# EAGLE board sonar_amplifierstage (EAGLE 7.6.0)
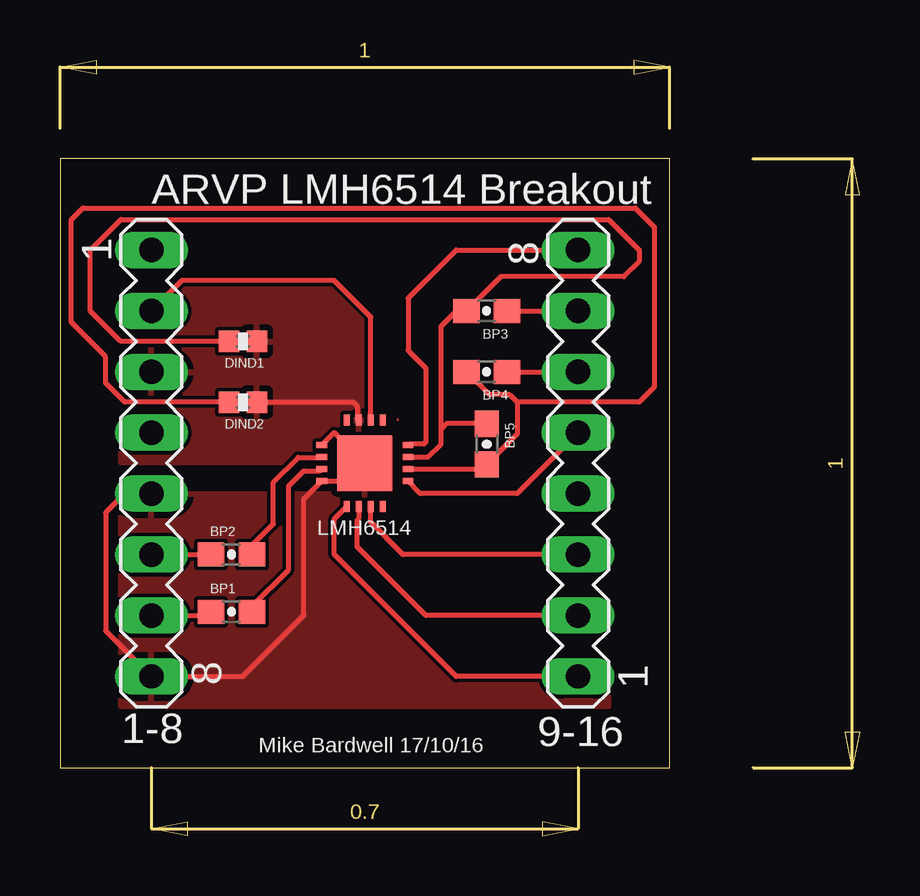
[diagram p0: board, top side]

Size 25.4 x 25.4 mm. Coordinates in mm from the lower left corner, seen from the top.
Outline: 0,0 25.4,0 25.4,25.4 0,25.4 0,0
Copper layers (1*16): Top 0.035mm / dielectric 1.5mm / Bottom 0.035mm
Design rules "ITead_rule": minimum track width 6mil, minimum drill 12mil, track to track 6mil, track to pad 6mil, pad to pad 6mil, via to via 6mil, smd to smd 0mil, copper to edge 10mil, drill to drill 10mil, minimum pad ring 10mil, minimum via ring 6mil, stop-mask expansion 2mil, vias tented up to drill 100mil, thermal gap 10mil

## Footprints (pad centres in the part's own frame; a part is rotated, then mirrored left to right if it is on the bottom)
MA08-1 = drill 1.016 long: 1 -8.89,0; 2 -6.35,0; 3 -3.81,0; 4 -1.27,0; 5 1.27,0; 6 3.81,0; 7 6.35,0; 8 8.89,0
0603-CAP = smd 1.1 x 1: 1 -0.85,0; 2 0.85,0
0402-RES = smd 0.85 x 0.9: 1 -0.58,0; 2 0.58,0
WQFN4X4 = smd 2.3 x 2.3: GND 0,0 | smd 0.25 x 0.45: P$1 0.75,1.8; P$2 0.25,1.8; P$3 -0.25,1.8; P$4 -0.75,1.8; P$9 -0.75,-1.8; P$10 -0.25,-1.8; P$11 0.25,-1.8; P$12 0.75,-1.8 | smd 0.45 x 0.25: P$5 -1.8,0.75; P$6 -1.8,0.25; P$7 -1.8,-0.25; P$8 -1.8,-0.75; P$13 1.8,-0.75; P$14 1.8,-0.25; P$15 1.8,0.25; P$16 1.8,0.75

## Placement (x,y rotation side)
1-8  [MA08-1]  3.81,12.7 270 top
9-16  [MA08-1]  21.59,12.7 90 top
BP1  160p  [0603-CAP]  7.14,6.51 0 top
BP2  160p  [0603-CAP]  7.14,8.89 0 top
BP3  160p  [0603-CAP]  17.78,19.05 180 top
BP4  160p  [0603-CAP]  17.78,16.51 180 top
BP5  1u  [0603-CAP]  17.78,13.49 270 top
DIND1  43n  [0402-RES]  7.62,17.78 180 top
DIND2  43n  [0402-RES]  7.62,15.24 180 top
U$1  LMH6514  [WQFN4X4]  12.7,12.7 0 top

## Library data of the parts
1-8 9-16 = con-lstb; OC_FARNELL: unknown; OC_NEWARK: unknown
BP1-BP5 = SparkFun-Capacitors
DIND1 DIND2 U$1 = SONAR

## Nets
GAIN0: 9-16.3 U$1.P$11
GAIN1: 9-16.2 U$1.P$10
GAIN2: 9-16.1 U$1.P$9
GND: 1-8.5 1-8.8 U$1.GND U$1.P$5 U$1.P$8
IN+: BP2.2 U$1.P$6
IN++: 1-8.6 BP2.1
IN-: BP1.2 U$1.P$7
IN--: 1-8.7 BP1.1
LATCH: 1-8.2 U$1.P$2
LOAD+: 9-16.5 U$1.P$13
LOAD-: 9-16.8 U$1.P$16
OUT+: BP4.2 BP5.2 DIND2.2 U$1.P$14
OUT++: 9-16.6 BP4.1
OUT-: BP3.2 BP5.1 DIND1.2 U$1.P$15
OUT--: 9-16.7 BP3.1
V+: 1-8.3 DIND1.1 DIND2.1 U$1.P$3

## Tracks (layer width: path | path; a pad name or v marks a point on that pad's centre or on a via)
GAIN0
  Top 0.203: 9-16.3 14.29,8.89 12.94,10.24 12.94,10.89 U$1.P$11
GAIN1
  Top 0.203: 9-16.2 15.24,6.35 12.38,9.21 12.38,10.32 12.46,10.4 12.46,10.89 U$1.P$10
GAIN2
  Top 0.203: 9-16.1 16.51,3.81 11.43,8.89 11.43,10.38 U$1.P$9
GND
  Top 0.203: U$1.P$5 11.42,13.97 11.43,13.97 U$1.GND 11.95,11.95 U$1.P$8 10.16,11.21 10.16,6.35 7.62,3.81 1-8.8 1.91,5.71 1.91,10.64 2.7,11.43 1-8.5
  pour Top: 2.54,11.43 22.86,11.43 22.86,2.54 2.54,2.54
IN+
  Top 0.203: BP2.2 7.99,9.26 8.89,10.16 8.89,11.91 9.92,12.94 10.89,12.94 U$1.P$6
IN++
  Top 0.203: 1-8.6 BP2.1
IN-
  Top 0.203: BP1.2 7.99,6.72 9.53,8.26 9.53,11.75 10.16,12.38 10.83,12.38 U$1.P$7
IN--
  Top 0.203: 1-8.7 6.29,6.35 BP1.1
LATCH
  Top 0.203: U$1.P$2 12.95,18.8 11.43,20.32 5.08,20.32 1-8.2
LOAD+
  Top 0.203: 9-16.5 19.05,11.43 15.02,11.43 U$1.P$13
LOAD-
  Top 0.203: 9-16.8 16.51,21.59 14.5,19.58 14.5,17.4 15.24,16.66 15.24,13.57 15.16,13.49 14.54,13.49 U$1.P$16
OUT+
  Top 0.203: 19.05,15.24 18.73,15.56 17.88,15.56 BP4.2 | 19.05,15.24 19.05,13.91 BP5.2 17.6,12.46 14.51,12.46 U$1.P$14 | DIND2.2 2.7,15.24 1.91,16.03 1.91,17.14 0.48,18.57 0.48,22.86 0.95,23.34 23.97,23.34 24.77,22.54 24.77,15.88 24.13,15.24 19.05,15.24
OUT++
  Top 0.203: BP4.1 9-16.6
OUT-
  Top 0.203: 15.88,14.13 15.88,18.41 16.51,19.05 BP3.2 18.36,20.48 23.5,20.48 24.13,21.11 24.13,21.59 22.86,22.86 2.54,22.86 1.27,21.59 1.27,19.05 2.54,17.78 DIND1.2 | BP5.1 16.09,14.34 15.88,14.13 | U$1.P$15 15.33,12.95 15.88,13.49 15.88,14.13
OUT--
  Top 0.203: BP3.1 9-16.7
V+
  Top 0.203: DIND2.1 12.22,15.24 12.38,15.08 12.38,14.57 U$1.P$3
  pour Top: 2.54,12.7 2.54,22.86 12.7,22.86 12.7,12.7

## Text on the board
tNames: ARVP LMH6514 Breakout | Mike Bardwell 17/10/16
bNames: NC | LOAD- | LATCH | OUT- | V+ | OUT+ | NC | LOAD+ | GND | NC | IN+ | GAIN0 | IN- | GAIN1 | GND | GAIN2